# Altium PCB Elreg_Sender.PcbDoc (part 2 of 2)
Units mil, origin at the board's own origin, x right, y up, seen from the top; angles counter-clockwise.
Board outline 5250 x 7100 mil, 4 copper layers (Top Layer, Internal Plane 1, Internal Plane 2, Bottom Layer), stack 61.634 mil thick; 174 components, 129 nets, 539 pads, 126 vias.
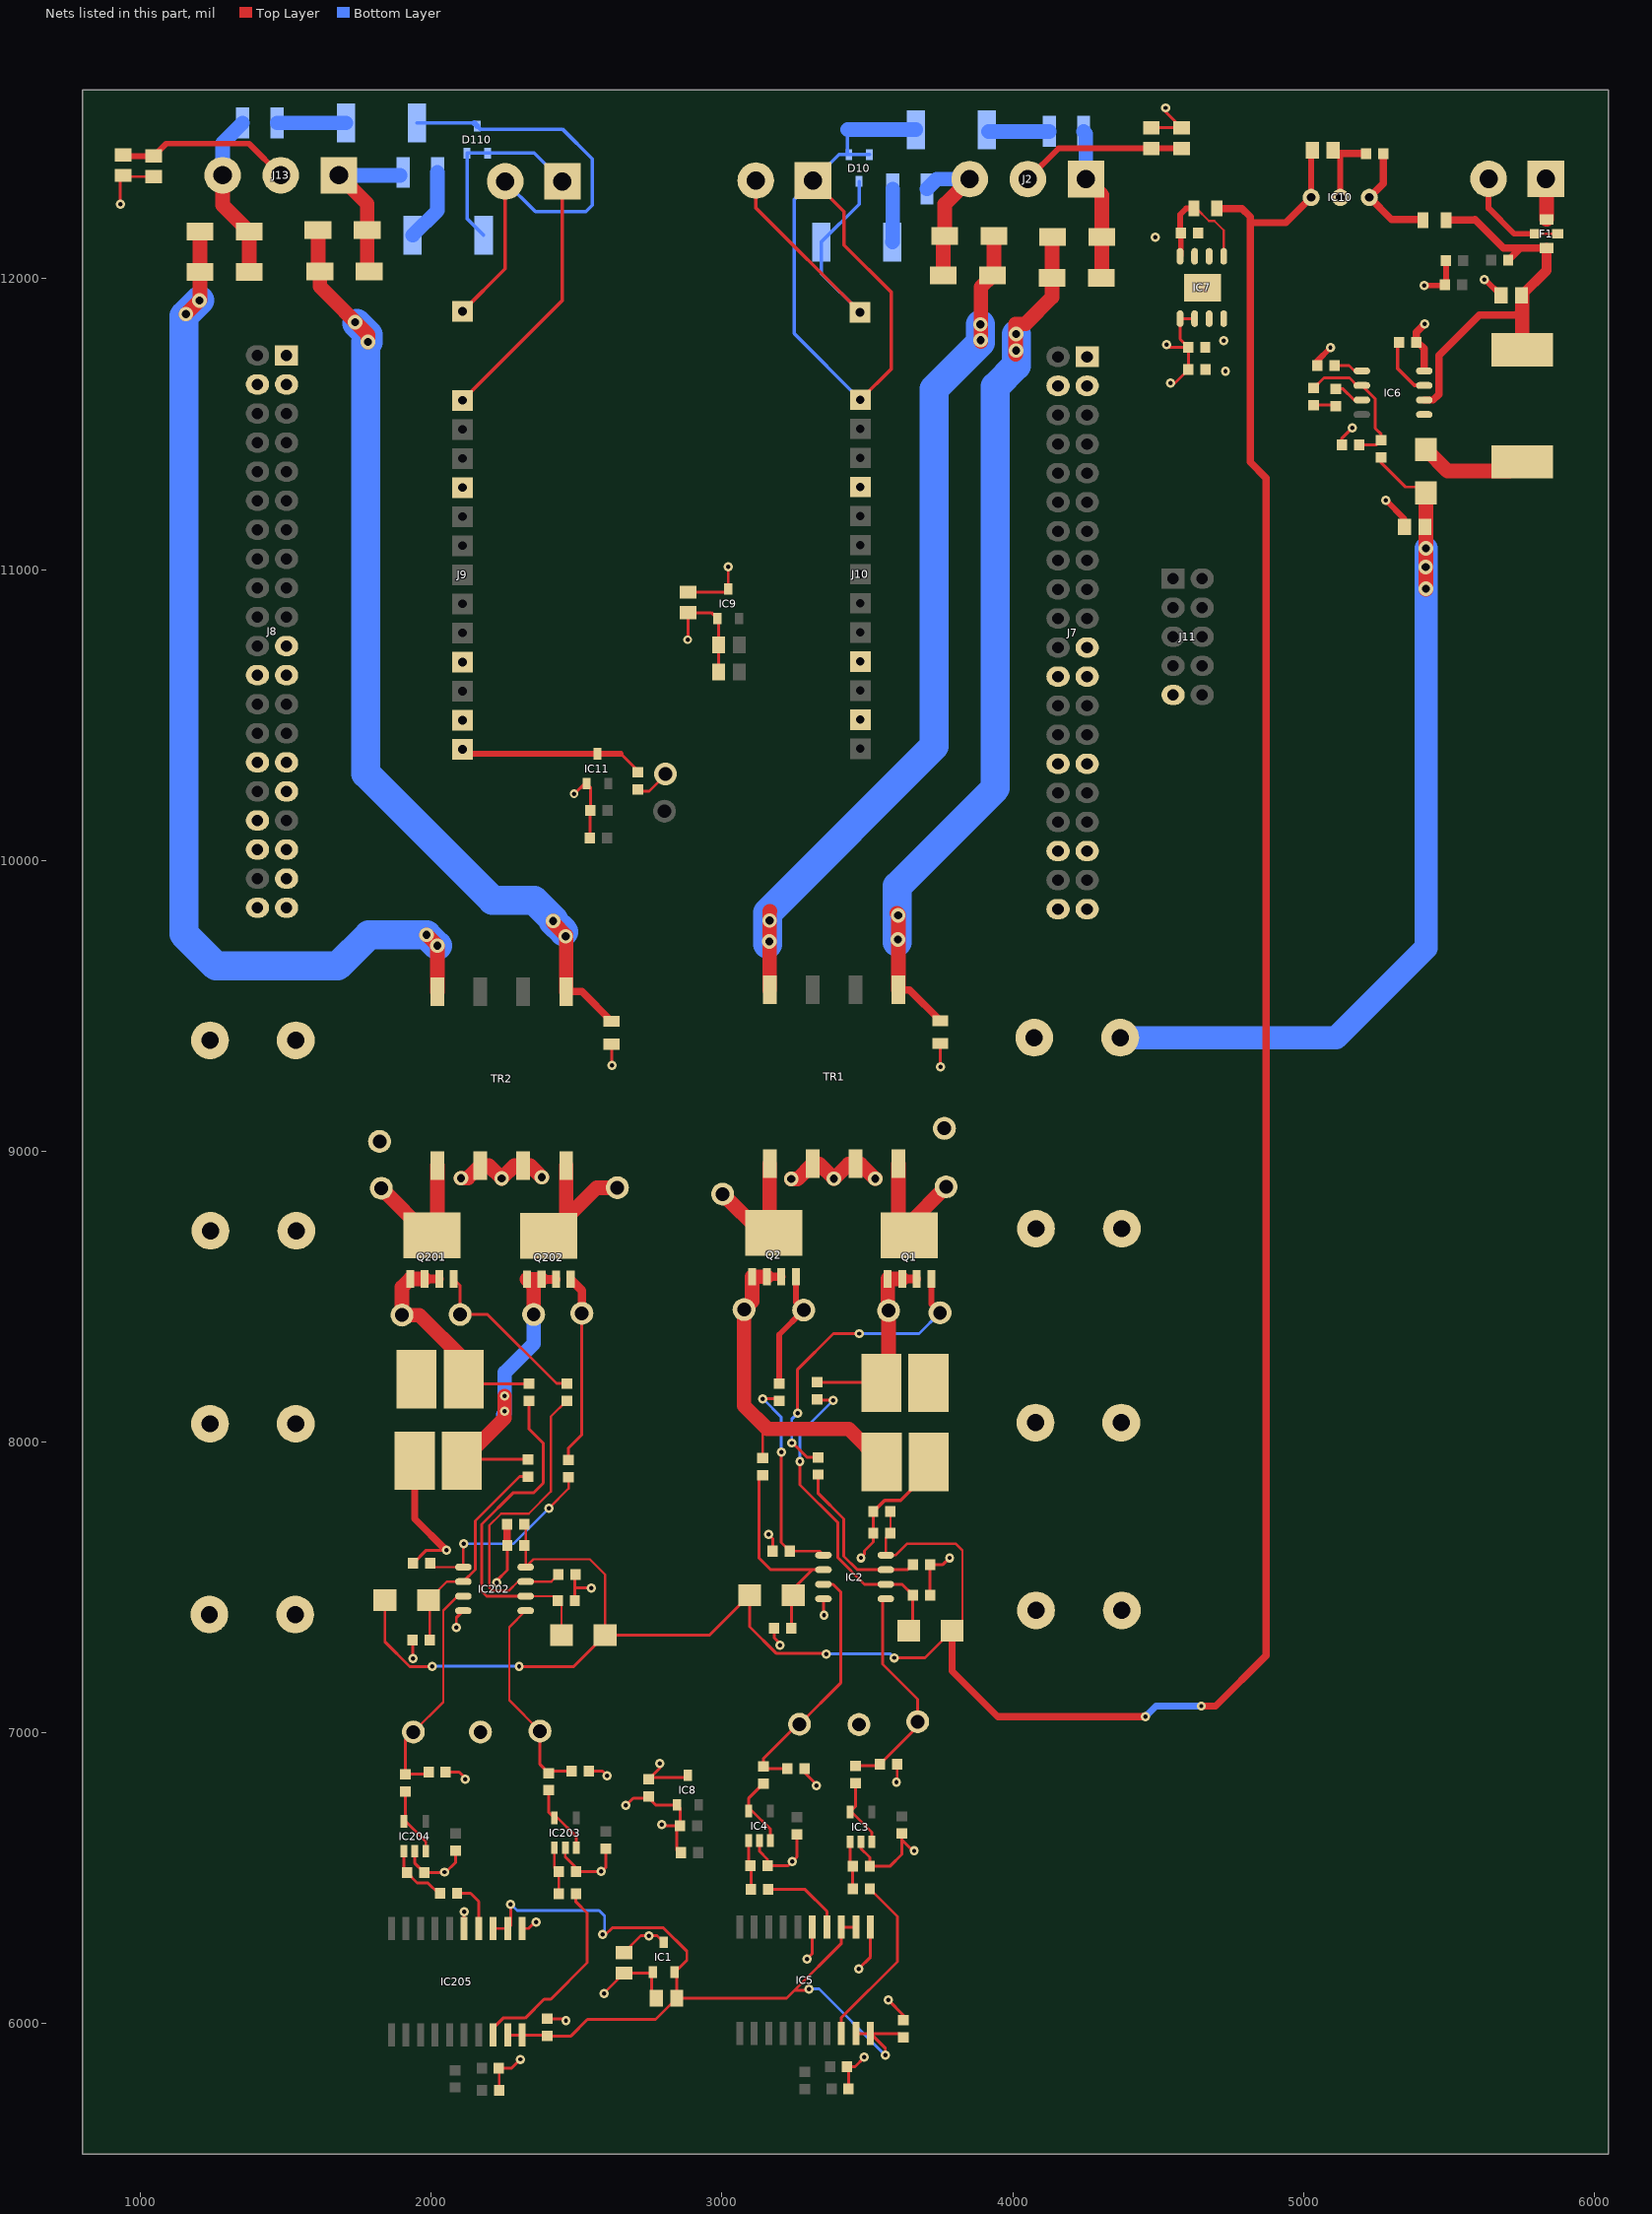
[diagram p4: the nets of this part, all layers, seen from the top]

## Via types
v1: diameter 32.01, hole 15, Top Layer to Bottom Layer, 98 vias
v2: diameter 50, hole 28, Top Layer to Bottom Layer, 25 vias
v3: diameter 30, hole 15, Top Layer to Bottom Layer, 2 vias
v4: diameter 78.74, hole 47.25, Top Layer to Bottom Layer, 1 vias

## Nets (pads, with @x,y where several pads share a name; then routed paths per layer and width w, separated by ;. In a path a pad name is that pad's centre, name@x,y a point inside that pad or via, vN(x,y) a via of type N, cw(c..) or ccw(c..) an arc to the next point about the centre after c; other vN are vias at no path point) (continued)
+6V5: C7.2 C31.1 C32.2 C33.1 C36.1 C41.1 IC1.3 IC7.1 IC7.2 IC8.3 IC9.3 IC11.3 J9.13 | length 1619.8
  Top Layer w10: 2652.07,10366.36 C41.1@2710,10308.43 ; C7.2@2663,6243.43 2720.57,6301 v1(2749,6301) 2776.76,6301 IC1.3@2799.4,6278.36 ; C33.1@2748,6839.53 C33.1@2753.91,6845.43 ; v1(2786,6893) 2786,6877.53 C33.1@2753.91,6845.43 ; IC8.3@2882.4,6853.36 2874.47,6845.43 C33.1@2753.91,6845.43 ; C36.1@2883,10922.43 3010.47,10922.43 IC9.3@3021.4,10933.36 3021.4,11009.6 v1(3021,11010) ; v1(4529,11774) 4538,11765 C31.1@4603.47,11765 ; v1(4543,11641) 4557.47,11641 C32.2@4604.47,11688 4604.47,11764 C31.1@4603.47,11765 ; IC7.2@4626,11863 IC7.1@4576,11863 4576,11792.47 C31.1@4603.47,11765
  Top Layer w20: J9.13@2107,10382 2122.64,10366.36 IC11.3@2571.4,10366.36 2652.07,10366.36
+12V: C1.2 C2.2 C40.2 C201.2 C202.2 D2.2 D8.2 D202.2 D208.2 IC2.8 IC10.3 IC202.8 L3.1 | length 10698.7
  Top Layer w8: C202.2@2324.57,7711.96 IC202.8@2324.57,7569 2351.57,7596 2545,7596 2597.61,7543.39 D202.2@2597.61,7335 ; C2.2@3579.53,7760 C1.2@3579.53,7686 3563.57,7670.04 IC2.8@3563.57,7610 3597,7610 3637,7650 3803,7650 3827,7626 3827,7385.39 D2.2@3791.61,7350
  Top Layer w10: D208.2@1840.39,7456 1840.39,7312.42 1925.81,7227 1992,7227 1993,7228 v1(2003,7228) ; v1(2302,7227) 2489.61,7227 D202.2@2597.61,7335 2957.39,7335 D8.2@3095.39,7473 3095.39,7363.61 3186,7273 3356,7273 v1(3359,7270) ; v1(3592,7257) 3698.61,7257 D2.2@3791.61,7350
  Top Layer w20: IC10.3@5027,12280 5027,12437.43 C40.2@5031.57,12442
  Top Layer w25: D2.2@3791.61,7350 3791.61,7211.39 3949,7054 v1(4456,7054) ; v1(4649,7091) 4698,7091 4872,7265 4872,11315 4817.37,11369.63 4817.37,12193 ; L3.1@4702.37,12242 4789,12242 4817.37,12213.63 4817.37,12193 ; IC10.3@5027,12280 4940,12193 4817.37,12193
  Bottom Layer w10: v1(2003,7228) 2301,7228 v1(2302,7227) ; v1(3359,7270) 3579,7270 v1(3592,7257)
  Bottom Layer w25: v1(4456,7054) 4493,7091 v1(4649,7091)
CH1_N_REC: D110.1 D110.2 J9.1 J14.1 R122.1 | length 1593.6
  Top Layer w12: J9.1@2107,11582 2451,11926 J14.1@2451,12335
  Top Layer w25: J9.1@2091,11566 J9.1@2107,11582
  Bottom Layer w12: R122.1@2180,12150 2122.57,12207.43 D110.2@2122.57,12432.74 D110.1@2193.43,12432.74 2353.26,12432.74 J14.1@2451,12335
CH1_P_REC: D110.3 J5.1 J14.2 R121.1 | length 1674.3
  Top Layer w12: J5.1@2107.02,11888 2254.15,12035.13 J14.2@2254.15,12335
  Bottom Layer w12: R121.1@1950,12536 D110.3@2147.26,12536 ; D110.3@2158,12525.26 2168.26,12515 2451,12515 2554,12412 2554,12253 2532,12231 2358.15,12231 J14.2@2254.15,12335
  Bottom Layer w20: D110.3@2147.26,12536 D110.3@2158,12525.26
CH2_N_REC: D10.1 D10.2 J3.1 J10.1 R22.1 | length 2339.6
  Top Layer w12: J3.1@3313,12338 3420,12231 3420,12116 3583,11953 3583,11691 J10.1@3476,11584
  Bottom Layer w12: 3432,12513 3432,12431.83 D10.1@3436.57,12427.26 ; J10.1@3476,11584 3248,11812 3248,12273 J3.1@3313,12338 3402.26,12427.26 D10.1@3436.57,12427.26 ; D10.2@3507.43,12427.26 D10.1@3436.57,12427.26
  Bottom Layer w50: 3432,12513 R22.1@3667,12513
CH2_P_REC: D10.3 J3.2 J6.1 R21.1 | length 1160.3
  Top Layer w12: J3.2@3116.15,12338 3116.15,12243.86 J6.1@3475.01,11885
  Bottom Layer w12: D10.3@3472,12334.74 3472,12257 R21.1@3342,12127 3342,12018.01 J6.1@3475.01,11885
DAC1_CH1: IC5.18 R4.1 | length 615.8
  Top Layer w10: IC5.18@3411,5964.86 3411,6020 3603,6212 3603,6367.53 R4.1@3508.53,6462
DAC1_CH2: IC205.18 R204.1 | length 692.9
  Top Layer w10: IC205.18@2213,5959.86 2213,5984 2247,6018 2323,6018 2388,6083 2411,6083 2536,6208 2536,6379 2497.53,6417.47 R204.1@2497.53,6445
DAC2_CH1: IC5.4 R12.1 | length 287.5
  Top Layer w10: R12.1@3158.53,6460 3286,6460 3361,6385 IC5.4@3361,6331
DAC2_CH2: IC205.4 R212.1 | length 179.1
  Top Layer w10: R212.1@2088.53,6447 2135,6447 2163,6419 IC205.4@2163,6326
DAC_REF: C8.2 C17.2 C217.2 IC1.2 IC5.2 IC5.3 IC5.19 IC5.20 IC205.2 IC205.3 IC205.19 IC205.20 | length 3121
  Top Layer w10: IC205.3@2213,6326 IC205.2@2263,6326 2273,6336 v1(2273,6409) ; IC205.19@2263,5959.86 IC205.20@2313,5959.86 2394.61,5959.86 C217.2@2398,5956.47 2480.47,5956.47 2537,6013 2771.44,6013 C8.2@2844.43,6086 ; v1(2589,6305) 2599,6305 2622,6328 2798.78,6328 2879,6247.78 2879,6217 2838,6176 IC1.2@2836.8,6176 2844.43,6168.37 C8.2@2844.43,6086 ; v1(3300,6118) 3295,6113 3249,6113 ; IC5.19@3461,5964.86 IC5.20@3511,5964.86 ; IC5.2@3461,6331 IC5.3@3411,6331 3411,6275 3249,6113 ; v1(3562,5890) 3562,5913.86 IC5.20@3511,5964.86 ; C17.2@3624,5951.47 3610.61,5964.86 IC5.20@3511,5964.86 ; C8.2@2844.43,6086 3222,6086 3249,6113
  Bottom Layer w10: v1(2273,6409) 2274,6409 2295,6388 2577.19,6388 2596,6369.19 2596,6312 v1(2589,6305) ; v1(3300,6118) 3334,6118 v1(3562,5890)
GND: C1.1 C2.1 C3.1 C4.1 C5.1 C6.2 C7.1 C8.1 C9.1 C10.1 C12.2 C14.1 C15.1 C16.1 C17.1 C19.2 C20.2 C21.2 C22.2 C23.2 C24.2 C25.2 C26.2 C27.2 C28.2 C29.2 C30.1 C31.2 C32.1 C33.2 C34.2 C35.1 C36.2 C37.2 C38.1 C40.1 C41.2 C42.2 C43.1 C201.1 C202.1 C203.1 C205.1 C209.1 C210.1 C212.2 C214.1 C215.1 C216.1 C217.1 F1.2 IC1.1 IC2.4 IC3.2 IC4.2 IC5.1 IC5.5 IC6.4 IC7.0 IC7.3 IC7.4 IC7.6 IC7.7 IC8.1 IC9.1 IC10.2 IC11.1 IC202.4 IC203.2 IC204.2 IC205.1 IC205.5 J1.2 J7.3 J7.4 J7.23 J7.24 J7.29 J7.30 J7.39 J7.40 J8.3 J8.4 J8.23 J8.24 J8.29 J8.30 J8.35 J8.36 J8.39 J8.40 J9.4 J9.10 J9.12 J10.4 J10.10 J10.12 J11.9 R1.1 R2.2 R6.1 R7.2 R8.1 R9.1 R10.2 R13.2 R15.2 R18.1 R19.1 R20.1 R201.1 R202.2 R206.1 R207.2 R208.1 R209.1 R210.2 R213.2 R215.2 TP1.1 TP6.1 | length 7462.2
  Top Layer w10: v1(930,12257) 930,12337.57 944,12351.57 C209.1@1045,12351.57 ; R210.2@1935.47,7318 1935.47,7255.53 v1(1937,7254) ; R209.1@1937.47,7582 1982.47,7627 v1@2051,7627 ; IC204.2@1943.6,6592 1943.6,6549.93 C214.1@1975.53,6518 2048,6518 2084,6554 C203.1@2084,6587.57 ; R213.2@2049.53,6864 2096,6864 v1@2118,6842 ; v1(2086,7362) 2086,7395 IC202.4@2110,7419 ; IC205.5@2113,6326 v1(2113,6383) ; v1(2225,7515) 2225,7522 2261.47,7558.47 C201.1@2261.47,7643 ; C215.1@2232.53,5845 2275,5845 v1(2306,5876) ; C216.1@2233.53,5770 C215.1@2233.53,5844 ; IC205.1@2313,6326 2334,6326 2356,6348 v1(2360,6348) ; C217.1@2398,6015.53 2456.47,6015.53 v1(2463,6009) ; IC203.2@2460.6,6604 2460.6,6572.4 2497.53,6535.47 C212.2@2497.53,6521 2585,6521 2600,6536 C205.1@2600,6594.57 ; v3(2491,10229) 2493,10229 2528,10264 IC11.1@2534,10264 2547.47,10250.53 C43.1@2547.47,10172 2545.47,10170 C42.2@2545.47,10076 ; R202.2@2493.53,7454 2493.53,7498 ; R201.1@2496.53,7544 2493.53,7541 2493.53,7498 ; R206.1@2541.53,6867 2589,6867 v1@2606,6850 ; v1(2550,7497) 2549,7498 2493.53,7498 ; v1(2595,6103) 2595,6104.57 C7.1@2663,6172.57 2758.57,6172.57 2758.57,6101 C8.1@2773.57,6086 ; v1@2620,9295 R208.1@2620,9367.63 ; v1@2666,6746 2694.57,6774.57 2748,6774.57 2771.57,6751 IC8.1@2845,6751 2855.47,6740.53 C34.2@2855.47,6679 C34.2@2845,6679 ; C41.2@2710,10237.57 2749.57,10237.57 v4@2792,10280 ; v1@2795,6683 2799,6679 C34.2@2845,6679 ; v4@2802,10297 v4(2805,10297) ; C35.1@2852.57,6587 2845,6594.57 C34.2@2845,6679 ; v3@2884,10759 2883,10760 C36.2@2883,10851.57 2963.43,10851.57 IC9.1@2984,10831 2988.57,10826.43 C37.2@2988.57,10741 C38.1@2988.57,10648 ; IC4.2@3129.6,6628 3129.6,6591.4 3156.53,6564.47 C14.1@3156.53,6542 3228,6542 3258,6572 C3.1@3258,6643.57 ; v1(3160,7681) 3174.47,7666.53 R9.1@3174.47,7624 ; R10.2@3179.47,7359 3179.47,7325.53 3199,7306 v1(3199,7300) ; R13.2@3283.53,6876 3283.53,6863.47 3325,6822 v1(3325,6817) ; v1(3292,6221) 3311,6240 IC5.5@3311,6331 ; IC2.4@3349,7460 3349,7406 v1(3351,7404) ; C16.1@3435.53,5774 3435.53,5846 C15.1@3430.53,5851 3458,5851 3489,5882 v1(3489,5884) ; v1(3470,6187) 3511,6228 IC5.1@3511,6331 ; IC3.2@3477.6,6624 3477.6,6601.4 3508.53,6570.47 C12.2@3508.53,6540 3579,6540 3579,6541 3619,6581 3619,6631 ; v1(3478,7601) 3490,7613 3490,7625 3520.47,7655.47 C1.1@3520.47,7686 C2.1@3520.47,7760 ; v1(3572,6080) 3624,6028 C17.1@3624,6010.53 ; v1(3600,6829) 3602.53,6831.53 R6.1@3602.53,6891 ; C5.1@3619,6652.47 3619,6631 ; v1(3661,6593) 3657,6593 3619,6631 ; R2.2@3715.53,7473 R1.1@3715.53,7578 3760,7578 v1(3783,7601) ; v1@3751,9289 R8.1@3751,9369.63 ; C10.1@4477,12519.43 C9.1@4581,12519.43 4526,12574.43 v1(4526,12588) ; R20.1@5132.47,11429 5132.47,11451.47 v1(5168,11487) ; F1.2@5798,12155 F1.2@5875,12155
  Top Layer w12: C2.1@3520.47,7760 3559.47,7799 3615,7799 3711.13,7895.13 R15.2@3711.13,7931
  Top Layer w20: v1(4726,11787) v1@4727,11787 ; R19.1@5047.47,11702 5047.47,11717.47 v1(5093,11763) ; C40.1@5113.43,12431 5127,12417.43 IC10.2@5127,12280 ; v1(5283,11239) 5347.57,11174.43 C6.2@5347.57,11147 ; v1(5415,11977) 5485.47,11977 C4.1@5487.47,11979 5490.47,11982 R18.1@5490.47,12063 ; v1(5622,11998) 5624.57,11998 C19.2@5679.57,11943 ; J1.2@5637.15,12344 5637.15,12242.85 5725,12155 F1.2@5798,12155
  Top Layer w25: R215.2@1942.87,7935 1942.87,7735.13 v1@2051,7627 ; C201.1@2260.47,7644 C202.1@2260.47,7717 ; C40.1@5102.43,12442 5113.43,12431 C29.2@5215.47,12431 ; C28.2@5388.53,11781 5388.53,11816.53 v1(5417,11845) ; C28.2@5394.43,11781 5415.75,11759.69 IC6.4@5415.75,11683.22
  other v1: 2045,6520 2584,6522 3242,6556 2793,6684 2669,6749 2117,6840 2605,6851 2052,7627 3751,9290 2622,9295 4732,11682 4490,12143
  other v3: 2882,10759
GND_CHASIS2: C209.2 C210.2 J13.2 | length 606.4
  Top Layer w20: C210.2@940,12426.43 944,12422.43 C209.2@1045,12422.43 1087.57,12465 1373,12465 J13.2@1482,12356
GND_CHASIS_1: C9.2 C10.2 J2.2 | length 572.7
  Top Layer w20: J2.2@4052,12343 4157.57,12448.57 C10.2@4477,12448.57 C9.2@4581,12448.57
I01A: J8.37
I01B: J8.34
I02: J8.21
I03: J8.1
I04: J8.31
I05: J7.36
I06: J7.1
I07: J7.21
I08: J7.35
NetC11_1: C11.1 DAC1_1.1 IC2.5 R6.2 | length 763.5
  Top Layer w10: C11.1@3459,6885.53 3538,6885.53 R6.2@3543.47,6891 3672.99,7020.52 DAC1_1.1@3672.99,7037.54 3672.99,7115.01 3553,7235 3553,7449.43 IC2.5@3563.57,7460
NetC11_2: C11.2 IC3.1 IC3.4 | length 244.4
  Top Layer w10: C11.2@3459,6826.47 3459,6745.17 IC3.4@3440.2,6726.36 3445.64,6726.36 3515,6657 IC3.1@3515,6624
NetC12_1: C12.1 IC3.3 R4.2 | length 165.8
  Top Layer w10: IC3.3@3440.2,6624 3440.2,6549.28 C12.1@3449.47,6540 R4.2@3449.47,6462
NetC13_1: C13.1 DAC2_1.1 IC2.3 R13.1 | length 869.5
  Top Layer w10: R13.1@3224.47,6876 3149.53,6876 C13.1@3142,6883.53 3142,6910 3260.54,7028.54 DAC2_1.1@3266.54,7028.54 3408,7170 3408,7484 3382,7510 IC2.3@3349,7510
NetC13_2: C13.2 IC4.1 IC4.4 | length 254.8
  Top Layer w10: C13.2@3142,6824.47 3092.2,6774.67 IC4.4@3092.2,6730.36 3103.64,6730.36 3167,6667 IC4.1@3167,6628
NetC14_2: C14.2 IC4.3 R12.2 | length 171.2
  Top Layer w10: IC4.3@3092.2,6628 3092,6627.8 3092,6547.47 C14.2@3097.47,6542 3099.47,6540 R12.2@3099.47,6460
NetC18_1: C18.1 IC6.7 | length 106
  Top Layer w10: C18.1@5111,11621.53 5136.47,11621.53 5174.78,11583.22 IC6.7@5201.18,11583.22
NetC18_2: C18.2 R17.1 | length 72
  Top Layer w10: R17.1@5036,11565.47 C18.2@5108,11565.47
NetC28_1: C28.1 IC6.3 | length 205.3
  Top Layer w12: C28.1@5323.57,11781 5323.57,11692.43 5382,11634 5414.97,11634 IC6.3@5415.75,11633.22
NetC29_1: C29.1 IC10.1 L2.2 | length 384.8
  Top Layer w25: C29.1@5274.53,12431 5274.53,12327.53 IC10.1@5227,12280 5303,12204 L2.2@5409.63,12204
NetC30_2: C30.2 IC7.5 IC7.8 L3.2 | length 505.7
  Top Layer w8: IC7.8@4576,12077.57 C30.2@4576,12155.53 ; C30.2@4578.47,12158 C30.2@4579.63,12159.16 ; L3.2@4623.63,12242 4632,12242 4675,12199 4694,12199 4726,12167 IC7.5@4726,12077.57
  Top Layer w20: IC7.8@4576,12077.57 4578.47,12080.04 C30.2@4578.47,12158 ; C30.2@4576,12155.53 4576,12221 4597,12242 L3.2@4623.63,12242
NetC44_1: C44.1 D203.2 D204.1 J13.3 | length 579.5
  Top Layer w50: J13.3@1282,12356 1282,12253.65 D204.1@1373.65,12162 D203.2@1373.65,12023
  Bottom Layer w50: J13.3@1282,12356 1282,12467.06 C44.1@1350.94,12536
NetC44_2: C44.2 R121.2 | length 236.9
  Bottom Layer w50: C44.2@1469.06,12536 R121.2@1705.91,12536
NetC45_1: C45.1 D205.1 D206.2 J13.1 | length 583.9
  Top Layer w50: J13.1@1682,12356 1779.65,12258.35 D206.2@1779.65,12168 1779.65,12032 D205.1@1785.65,12026
  Bottom Layer w50: J13.1@1682,12356 C45.1@1892.94,12356
NetC45_2: C45.2 R122.2 | length 251.3
  Bottom Layer w50: R122.2@1935.91,12150 2021.06,12235.15 C45.2@2021.06,12366
NetC211_1: C211.1 DAC1_2.1 IC202.5 R206.2 | length 719.4
  Top Layer w8: IC202.5@2324.57,7419 2268,7362.43 2268,7111 DAC1_2.1@2374,7005
  Top Layer w10: DAC1_2.1@2374,7005 2374,6890.53 C211.1@2404,6860.53 2410.47,6867 R206.2@2482.47,6867
NetC211_2: C211.2 IC203.1 IC203.4 | length 243.1
  Top Layer w10: C211.2@2404,6801.47 2404,6725.56 IC203.4@2423.2,6706.36 2434.64,6706.36 2498,6643 IC203.1@2498,6604
NetC212_1: C212.1 IC203.3 R204.2 | length 165.3
  Top Layer w10: IC203.3@2423.2,6604 2423.2,6536.28 C212.1@2438.47,6521 R204.2@2438.47,6445
NetC213_1: C213.1 DAC2_2.1 IC202.3 R213.1 | length 790.6
  Top Layer w8: DAC2_2.1@1938,7002 2041,7105 2041,7420 2090,7469 IC202.3@2110,7469
  Top Layer w10: DAC2_2.1@1938,7002 1910,6974 C213.1@1910,6856.53 1983,6856.53 R213.1@1990.47,6864
NetC213_2: C213.2 IC204.1 IC204.4 | length 241.3
  Top Layer w10: C213.2@1910,6797.47 1910,6698.17 IC204.4@1906.2,6694.36 1911.83,6694.36 1981,6625.19 IC204.1@1981,6592
NetC214_2: C214.2 IC204.3 R212.2 | length 220.7
  Top Layer w10: IC204.3@1906.2,6592 1906.2,6528.28 C214.2@1916.47,6518 1951.47,6483 1988,6483 2024,6447 R212.2@2029.47,6447
NetC244_1: C244.1 D3.2 D4.1 J2.3 | length 530.6
  Top Layer w50: D3.2@3761.35,12011 3761.35,12143 D4.1@3766.35,12148 3766.35,12257.35 J2.3@3852,12343
  Bottom Layer w50: C244.1@3705.06,12309 3739.06,12343 J2.3@3852,12343
NetC244_2: C244.2 R21.2 | length 182.4
  Bottom Layer w50: R21.2@3586.09,12127 3586.94,12127.85 C244.2@3586.94,12309
NetC245_1: C245.1 D5.2 D6.1 J2.1 | length 529.8
  Top Layer w50: J2.1@4252,12343 4306.65,12288.35 D6.1@4306.65,12144 4306.65,12006 D5.2@4304.65,12004
  Bottom Layer w50: C245.1@4244.06,12507 4252,12499.06 J2.1@4252,12343
NetC245_2: C245.2 R22.2 | length 208.9
  Bottom Layer w50: R22.2@3917.09,12507 C245.2@4125.94,12507
NetD1_1_1: D1_1.1 Q1.2 TR1.4 | length 481
  Top Layer w50: TR1.4@3606.91,8956 3606.91,8747.89 Q1.2@3644.8,8710 3644.8,8750.8 D1_1.1@3771,8877
NetD1_2_1: D1_2.1 Q201.2 TR2.1 | length 488.9
  Top Layer w50: D1_2.1@1828,8872 1990,8710 Q201.2@2001.8,8710 2021,8729.2 TR2.1@2021,8950
NetD2_1: D2.1 IC2.6 R2.1 R5.1 | length 1146.2
  Top Layer w10: v1(3268,7932) 3268,7852 3399,7721 3399,7601 3490,7510 IC2.6@3563.57,7510 3619.47,7510 R2.1@3656.47,7473 3656.47,7353.47 D2.1@3645,7342 ; R5.1@3328,8145.47 3330.47,8143 v1(3383,8143)
  Bottom Layer w10: v1(3268,7932) 3268,8028 v1(3383,8143)
NetD2_1_1: D2_1.1 Q2.2 TR1.1 | length 476.4
  Top Layer w50: D2_1.1@3002,8852 3136,8718 Q2.2@3178.8,8718 3164,8732.8 TR1.1@3164,8956
NetD2_2_1: D2_2.1 Q202.2 TR2.4 | length 400.4
  Top Layer w50: TR2.4@2463.91,8950 2463.91,8769.11 2568.8,8874 D2_2.1@2640,8874
NetD3_1: D3.1 D4.2 TR1.8 | length 3087.7
  Top Layer w50: TR1.8@3164,9554.43 3164,9824 3165,9825 ; v2@3891,11784 3891,11971.35 D3.1@3930.65,12011 3935.65,12016 D4.2@3935.65,12148
  Bottom Layer w100: v2@3157,9712 3157,9820 3730,10393 3730,11622 3889,11781 v2(3889,11843)
  other v2: 3163,9721 3164,9793 3890,11789
NetD5_1: D5.1 D6.2 R8.2 TR1.5 | length 3190.7
  Top Layer w25: TR1.5@3606.91,9554.43 3644.94,9554.43 R8.2@3751,9448.37
  Top Layer w50: v2@3602,9818 3606.91,9813.09 TR1.5@3606.91,9554.43 ; v2@4010,11741 4010,11845 4044,11845 4135.35,11936.35 D5.1@4135.35,12004 4135.35,12142 D6.2@4137.35,12144
  Bottom Layer w100: v2@3603,9718 3603,9911 3940,10248 3940,11629 4012,11701 v2(4012,11753) v2(4012,11810)
  other v2: 3605,9728 3606,9811
NetD8_1: D8.1 IC2.2 R10.1 R14.1 | length 760.4
  Top Layer w10: R14.1@3140,7885.47 3127,7872.47 3127,7600 3167,7560 3311,7560 ; R10.1@3238.53,7359 3238.53,7466.53 D8.1@3245,7473 3245,7494 3311,7560 ; IC2.2@3349,7560 3311,7560
NetD9_1: D9.1 IC6.1 L1.2 | length 374.6
  Top Layer w50: D9.1@5422,11413 5496,11339 5708,11339 5739.17,11370.17 L1.2@5753,11370.17
NetD202_1: D202.1 IC202.6 R202.1 R205.1 | length 1202.9
  Top Layer w8: IC202.6@2324.57,7469 2419.47,7469 R202.1@2434.47,7454 2448,7440.47 D202.1@2448,7335
  Top Layer w10: IC202.6@2324.57,7469 2190,7469 2173,7486 2173,7716 2282.5,7825.5 2352.5,7825.5 2385,7858 2385,7995 2336,8044 R205.1@2336,8140.47
NetD203_1: D203.1 D204.2 TR2.8 | length 3693.4
  Top Layer w50: v2(1156,11879.06) v2(1202.68,11925.73) ; v2@1202,11925 1204.35,11927.35 D203.1@1204.35,12023 D204.2@1204.35,12162 ; v2(1983.68,9743.73) v2(2021,9706.41) TR2.8@2021,9548.43
  Bottom Layer w100: v2(1202.68,11925.73) v2(1156,11879.06) 1149,11872.06 1149,9747 1259,9637 1678,9637 1784.73,9743.73 v2(1983.68,9743.73) 1983.68,9743.32 v2@2021,9706
NetD205_2: D205.2 D206.1 R208.2 TR2.5 | length 3380.4
  Top Layer w25: TR2.5@2463.91,9548.43 2517.94,9548.43 R208.2@2620,9446.37
  Top Layer w50: D205.2@1610.35,12032 D206.1@1610.35,12168 ; D205.2@1616.35,12026 1616.35,11973.65 1782,11808 v2(1782,11783) ; v2(2419,9791) 2419,9786 2463.91,9741.09 TR2.5@2463.91,9548.43
  Bottom Layer w100: v2@1743,11847 1782,11808 v2(1782,11783) ; v2@1775,11783 1775,10298 2210,9863 2353,9863 v2@2422,9794 ; v2(2419,9791) v2@2456,9754
  other v2: 2462,9739 1738,11851
NetD208_1: D208.1 IC202.2 R210.1 R214.1 | length 757.1
  Top Layer w8: R210.1@1994.53,7318 1994.53,7451.47 D208.1@1990,7456 2053,7519 IC202.2@2110,7519
  Top Layer w10: IC202.2@2110,7519 2151,7560 2151,7728 2303.47,7880.47 R214.1@2333,7880.47
NetF1_1: F1.1 J1.1 | length 141.2
  Top Layer w25: J1.1@5834,12344 J1.1@5837,12341
  Top Layer w50: F1.1@5837,12204 J1.1@5837,12341
NetG1_1_1: G1_1.1 Q1.1 R3.2 | length 1075.2
  Top Layer w10: v1@3237,7999 v1(3240,7996) 3243,7996 3292.47,7946.53 R3.2@3330,7946.53 ; v1(3260,8098) 3260,8249 3383,8372 v1(3472,8372)
  Top Layer w19.68: Q1.1@3720,8560 3720,8474 G1_1.1@3750,8444
  Bottom Layer w10: v1(3240,7996) 3240,8078 v1(3260,8098) ; v1(3472,8372) 3678,8372 G1_1.1@3750,8444
NetG1_2_1: G1_2.1 Q201.1 R203.2 | length 596.5
  Top Layer w10: Q201.1@2077,8560 2099,8538 G1_2.1@2099,8438 2193,8438 2430.47,8200.53 R203.2@2466,8200.53
NetG2_1_1: G2_1.1 Q2.1 R11.2 | length 413.5
  Top Layer w19.68: R11.2@3197,8200.53 3197,8369 G2_1.1@3281,8453 3254,8480 Q2.1@3254,8568
NetG2_2_1: G2_2.1 Q202.1 R211.2 | length 656.7
  Top Layer w10: R211.2@2472,7937.53 2472,7979 2518,8025 G2_2.1@2518,8442
  Top Layer w30: Q202.1@2479,8559 2518,8520 G2_2.1@2518,8442
NetIC2_1: IC2.1 R9.2 R11.1 | length 744.3
  Top Layer w10: v1(3140,8148) 3190.47,8148 R11.1@3197,8141.47 ; v1(3204,7964) 3204,7653.53 R9.2@3233.53,7624 3335,7624 IC2.1@3349,7610
  Bottom Layer w10: v1(3140,8148) 3141,8148 3204,8085 v1(3204,7964)
NetIC2_7: IC2.7 R1.2 R3.1 | length 582.3
  Top Layer w10: R3.1@3330,7887.47 3330,7824 3419,7735 3419,7606 3465,7560 IC2.7@3563.57,7560 3638.47,7560 R1.2@3656.47,7578
NetIC6_5: IC6.5 R19.2 | length 102.4
  Top Layer w10: R19.2@5106.53,11702 5157,11702 5175.78,11683.22 IC6.5@5201.18,11683.22
NetIC6_6: IC6.6 R16.1 R17.2 R20.2 | length 488.8
  Top Layer w10: R17.2@5036,11624.53 5070.47,11659 5159,11659 5184.78,11633.22 IC6.6@5201.18,11633.22 5247,11587.4 5247,11486 5268,11465 R16.1@5268,11445.53 5251.47,11429 R20.2@5191.53,11429
NetIC202_1: IC202.1 R209.2 R211.1 | length 679
  Top Layer w8: R209.2@1996.53,7582 2009.53,7569 IC202.1@2110,7569 2110,7649 v1(2111,7650) ; v1(2405,7772) 2472,7839 R211.1@2472,7878.47
  Bottom Layer w8: v1(2111,7650) 2283,7650 v1(2405,7772)
NetIC202_7: IC202.7 R201.2 R203.1 | length 1074.1
  Top Layer w8: 2235.77,7489 2209,7489 2199,7499 2199,7712 2240,7753 2335,7753 2411,7829 2411,8086.47 R203.1@2466,8141.47 ; 2235.78,7489 2268,7489 2298,7519 IC202.7@2324.57,7519 2412.47,7519 R201.2@2437.47,7544
NetQ1_3: Q1.3 R5.2 R7.1 S1_1.1 | length 689.2
  Top Layer w10: R5.2@3328,8204.53 3546.47,8204.53 R7.1@3548,8203
  Top Layer w30: Q1.3@3620,8560 Q1.3@3670,8560
  Top Layer w50: R7.1@3548,8203 3573,8228 S1_1.1@3573,8451 3570,8454 Q1.3@3570,8560 Q1.3@3620,8560
NetQ2_3: Q2.3 R14.2 R15.1 S2_1.1 | length 1214.6
  Top Layer w10: R14.2@3140,7944.53 3140,8028 3156,8044
  Top Layer w30: Q2.3@3154,8568 Q2.3@3204,8568
  Top Layer w50: Q2.3@3154,8568 Q2.3@3104,8568 3104,8483 S2_1.1@3076,8455 3076,8124 3156,8044 3181,8044 3436,8044 R15.1@3549,7931
NetQ201_3: Q201.3 R205.2 R207.1 S1_2.1 | length 811
  Top Layer w10: R207.1@2111,8215 2126.47,8199.53 R205.2@2336,8199.53
  Top Layer w30: Q201.3@1977,8560 Q201.3@2027,8560
  Top Layer w50: Q201.3@1977,8560 Q201.3@1927,8560 1899,8532 S1_2.1@1899,8436 1959,8436 2111,8284 R207.1@2111,8215
NetQ202_3: Q202.3 R214.2 R215.1 S2_2.1 | length 1113.5
  Top Layer w10: R215.1@2122,7939.53 R214.2@2333,7939.53
  Top Layer w30: Q202.3@2379,8559 Q202.3@2429,8559
  Top Layer w50: R215.1@2105,7935 2252,8082 v1(2252,8158) ; S2_2.1@2352,8438 2352,8536 Q202.3@2329,8559 Q202.3@2379,8559
  Bottom Layer w50: v1@2248,8093 2252,8097 v1(2252,8158) 2252,8238 2352,8338 S2_2.1@2352,8438
  other v1: 2252,8105
VIN: C19.1 F1.3 IC6.2 L1.1 L2.1 R24.2 | length 1420.2
  Top Layer w25: IC6.2@5415.75,11583.22 5446.22,11583.22 5466,11603 5466,11736 5605,11875 5730,11875 5750.43,11895.43 C19.1@5750.43,11943 C19.1@5753,11940.43 ; L2.1@5490.37,12202 5588.37,12202 ; 5590.37,12204 5688.8,12105.57 5746.1,12105.57 ; R24.2@5704.53,12064 5746.1,12105.57 ; F1.3@5837,12105.57 5746.1,12105.57
  Top Layer w35: C19.1@5750.43,11943 5837,12029.57 F1.3@5837,12105.57
  Top Layer w50: L1.1@5753,11756 C19.1@5753,11940.43
VTX: C6.1 C20.1 C21.1 C22.1 C23.1 C24.1 C25.1 C26.1 C27.1 D9.2 R16.2 TR1.2 TR1.3 TR2.2 TR2.3 VTX_TP1.1 VTX_TP2.1 | length 3824.9
  Top Layer w10: R16.2@5268,11386.47 5268,11367 5351,11284 5401.39,11284 D9.2@5422,11263.39
  Top Layer w50: v2(2102,8907) 2125.64,8907 TR2.2@2168.64,8950 2198,8950 v2(2242,8906) 2286,8950 TR2.3@2316.28,8950 2340,8950 v2(2380,8910) ; v2(3238,8904) 3259.64,8904 TR1.2@3311.64,8956 3334,8956 v2(3385,8905) 3436,8956 TR1.3@3459.28,8956 3476,8956 v2(3527,8905) ; v2@5422,10932 v2(5422,11073) D9.2@5422,11263.39
  Bottom Layer w80: C20.1@4369.64,9390 5113,9390 5422,9699 v2(5422,11073)
  other v2: 5422,10934 5421,11009
pads on no net: J7.18 J7.20 J7.31 J7.33 J8.32 J9.11 J10.11 J10.13 J11.1 J11.2 J11.4 J11.6 J11.7 J11.8 J11.10 TR1.6 TR1.7 TR2.6 TR2.7

## Polygon pours and split planes (outlines as drawn)
NetD9_1 on Top Layer "Top Layer-No Net" (solid, pour order 14): 5353,11418 5353,11550 5468,11550 5470,11552 5471,11551 5482,11551 5482,11358 5487,11353 5479,11361 5353,11361
VTX on Top Layer "Top Layer-No Net" (solid, pour order 11): 4218,7283 4218,9594 4531,9594 4532,9593 4532,7284 4218,7284
VTX on Top Layer "Top Layer-No Net" (solid, pour order 10): 1128,9516 1392,9516 1392,7242 1389,7239 1388,7238 1124,7238 1124,9516
GND on Top Layer "Top Layer-No Net" (solid, pour order 9): 3855,7285 4192,7285 4192,9595 3826,9595 3826,8371 3823,8368 3647,8368 3647,7705 3649,7703 3656,7696 3776,7696 3785,7696 3826,7655 3857,7624 3857,7287 3855,7285
GND on Top Layer "Top Layer-No Net" (solid, pour order 8): 1418,9511 1754,9511 1757,9508 1769,9496 1769,8349 1971,8349 1986,8334 2008,8312 2008,8296 2008,7734 2016,7726 2013,7723 1778,7723 1773,7718 1773,7241 1441,7241 1418,7264 1418,9510
GND on Top Layer "Top Layer-No Net" (solid, pour order 13): 4605,12203 4656,12203 4668,12191 4670,12189 4691,12189 4691,12187 4710,12168 4713,12165 4713,12123 4713,12036 4719,12030 4729,12020 4769,12020 4786,12020 4787,12021 4775,12009 4775,11623 4625,11623 4625,11822 4631,11822 4643,11834 4646,11837 4646,11902 4563,11902 4562,11903 4512,11903 4511,11902 4511,12042 4587,12042 4594,12049 4595,12050 4595,12123 4595,12128 4600,12133 4602,12135 4602,12184
VTX on Bottom Layer "Bottom_VTX" (solid, pour order 12): 1121,7243 1117,7247 1117,9511 1686,9511 1688,9509 1689,9508 1689,9215 1689,9213 1876,9026 1902,9052 3637,9052 3643,9052 3911,9320 3911,9701 4533,9701 4536,9704 4520,9688 4520,7242 3911,7242 3907,7246 3907,8868 1703,8868 1702,8869 1699,8866 1699,7243 1123,7243
GND on Internal Plane 1 (split plane): 6029.9,12463 5728,12463 5727,12462 5727,12169 5744,12152 6020,12152 6021,12151 6029.9,12159.9 6029.9,11829 5581,11829 5578,11832 5495,11749 5495,11375 5504,11366 5643,11366 5645,11368 5645,11426 5857,11426 5861,11422 5861,11301 5862,11300 5862,11293 6029.9,11293 6029.9,5570.1 820.1,5570.1 820.1,12629.9 6029.9,12629.9
+6V5 on Internal Plane 2 (split plane): 6029.9,12460.1 6028,12462 5727,12462 5727,12171 5726,12170 5743,12153 6029.9,12153 6029.9,11829 5575,11829 5575,11828 5494,11747 5498,11743 5498,11364 5644,11364 5645,11363 5645,11427 5858,11427 5859,11428 5861,11426 5861,11291 6029.9,11291 6029.9,5570.1 820.1,5570.1 820.1,12629.9 6029.9,12629.9

## Other copper
Internal Plane 1 (plane layer: these items are gaps in the copper):
  region: 5728,12463 6031,12463 6031,12161 6021,12151 6020,12152 5744,12152 5727,12169 5727,12462
  region: 6049,11829 5581,11829 5578,11832 5495,11749 5495,11375 5504,11366 5643,11366 5645,11368 5645,11426 5857,11426 5861,11422 5861,11301 5862,11300 5862,11293 6049,11293
Internal Plane 2 (plane layer: these items are gaps in the copper):
  region: 6030,12153 5743,12153 5726,12170 5727,12171 5727,12462 6028,12462 6030,12460
  region: 6045,11831 6043,11829 5575,11829 5575,11828 5494,11747 5498,11743 5498,11364 5644,11364 5645,11363 5645,11427 5858,11427 5859,11428 5861,11426 5861,11291 6049,11291 6045,11295

## Silkscreen, mask and mechanical layers (free items; w line width, h text height)
Top Overlay:
  lines w5.91: 3672,11628 3673,11629
  text "GND" at 2870,10303 h60
  text "5V FPGA" at 2757,10030 h60
Bottom Overlay:
  lines w7.87: 1337,11786 4327,11786
Mechanical 1:
  lines w5.91: 6076.21,12639.21 6077,12640 ; 800,5550 800,12650 850,12650 6050,12650 6050,5550 800,5550